# Altium PCB 夏友.PcbDoc (part 3 of 6)
Units mm, origin at the board's own origin, x right, y up, seen from the top; angles counter-clockwise.
Board outline 130.55 x 65.02 mm, 2 copper layers (Top Layer, Bottom Layer); 162 components, 175 nets, 628 pads, 694 vias.
Unrouted connection lines stored in the file: 1.
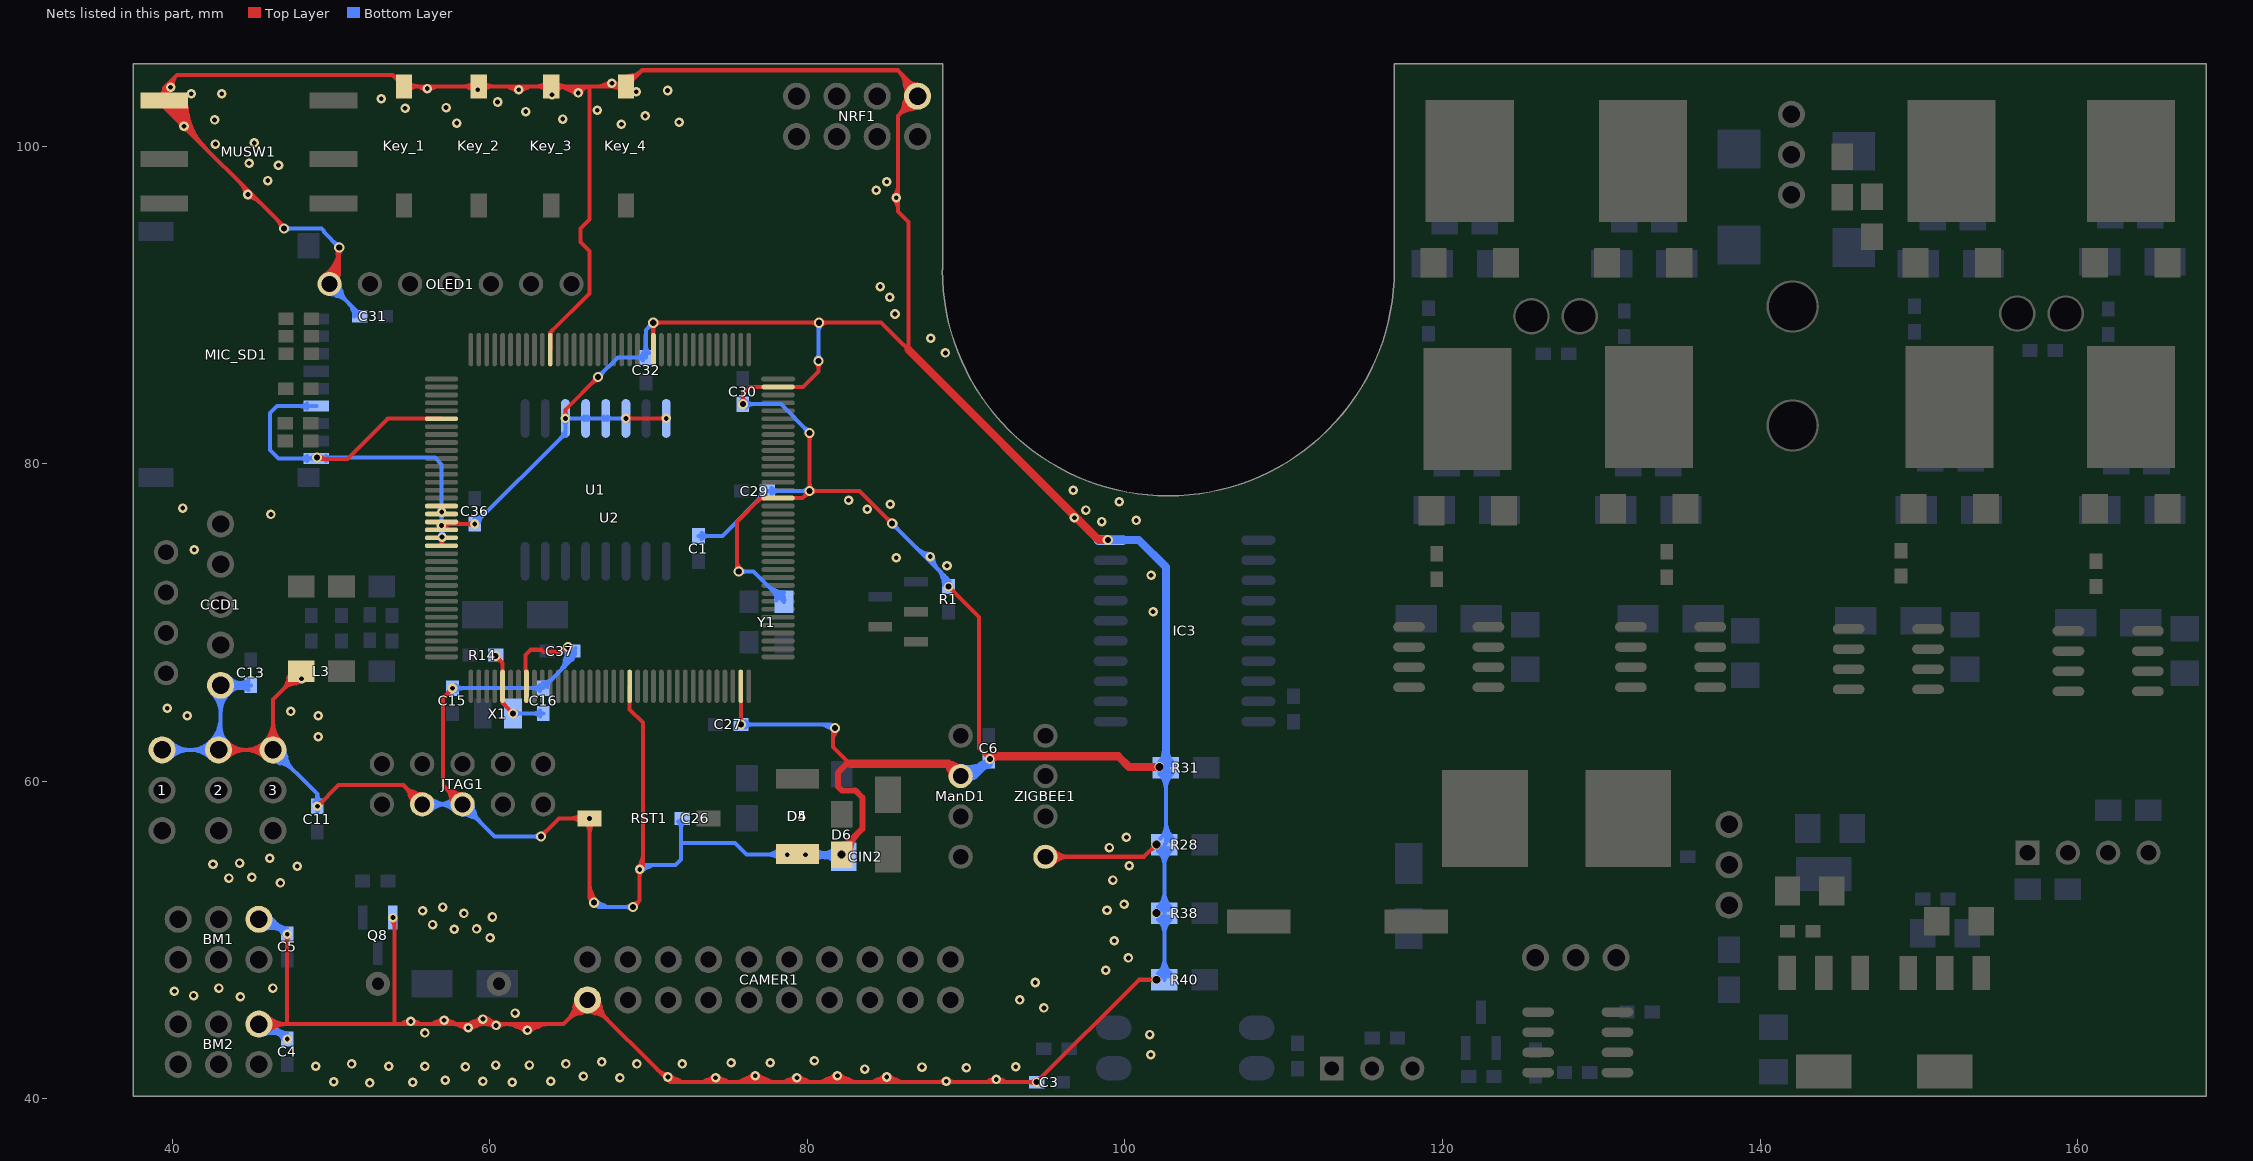
[diagram p3: the nets of this part, all layers, seen from the top]

## Via types
v1: diameter 0.6, hole 0.3, Top Layer to Bottom Layer, 442 vias
v2: diameter 0.635, hole 0.381, Top Layer to Bottom Layer, 150 vias
v3: diameter 0.6, hole 0.381, Top Layer to Bottom Layer, 48 vias
v4: diameter 0.7, hole 0.6, Top Layer to Bottom Layer, 16 vias
v5: diameter 0.6, hole 0.5, Top Layer to Bottom Layer, 10 vias
v6: diameter 0.6, hole 0.4, Top Layer to Bottom Layer, 7 vias
v7: diameter 0.7, hole 0.5, Top Layer to Bottom Layer, 5 vias
v8: diameter 0.6, hole 0.33, Top Layer to Bottom Layer, 5 vias
v9: diameter 0.7, hole 0.4, Top Layer to Bottom Layer, 3 vias
v10: diameter 1, hole 1, Top Layer to Bottom Layer, 2 vias
v11: diameter 3, hole 3, Top Layer to Bottom Layer, 2 vias
v12: diameter 1.016, hole 0.762, Top Layer to Bottom Layer, 2 vias
v13: diameter 0.7, hole 0.381, Top Layer to Bottom Layer, 1 vias
v14: diameter 0.635, hole 0.508, Top Layer to Bottom Layer, 1 vias

## Nets (pads, with @x,y where several pads share a name; then routed paths per layer and width w, separated by ;. In a path a pad name is that pad's centre, name@x,y a point inside that pad or via, vN(x,y) a via of type N, cw(c..) or ccw(c..) an arc to the next point about the centre after c; other vN are vias at no path point) (continued)
DGND: (continued)
  Bottom Layer w0.254: 1.1@39.37,61.976 2.1@42.926,61.976 43.053,62.103 CCD1.5@43.053,66.04 C13.1@44.958,66.04 ; BM2.1@45.466,44.704 46.304,44.704 v1(47.244,43.764) ; BM1.1@45.466,51.308 46.304,51.308 v1(47.244,50.368) ; 3.1@46.068,61.917 ccw(c47.074,62.123) 46.808,61.132 ; 3.1@46.317,61.968 ccw(c47.524,62.215) 47.205,61.025 ; 3.1@46.355,61.976 49.149,59.182 v1(49.149,58.42) C11.1@49.149,58.097 ; 3.1@46.363,62.014 cw(c46.116,60.807) 47.306,61.126 ; 3.1@46.414,62.263 cw(c46.208,61.257) 47.199,61.523 ; 46.818,44.234 cw(c46.666,43.668) C4.2@47.226,43.841 ; 46.818,50.838 cw(c46.666,50.272) C5.2@47.226,50.445 ; 46.836,44.137 ccw(c47.187,44.34) C4.2@47.227,43.936 ; 46.836,50.741 ccw(c47.187,50.944) C5.2@47.227,50.54 ; C4.2@46.856,43.992 ccw(c47.118,44.144) C4.2@47.237,43.864 ; C5.2@46.856,50.596 ccw(c47.118,50.748) C5.2@47.237,50.468 ; v2(47.052,94.805) 47.057,94.8 49.405,94.8 49.568,94.637 49.568,94.582 v2(50.525,93.625) ; C4.2@47.071,44.087 cw(c46.849,43.947) C4.2@47.087,43.837 ; C5.2@47.071,50.691 cw(c46.849,50.551) C5.2@47.087,50.441 ; C4.2@47.076,44.079 ccw(c47.356,44.255) C4.2@47.282,43.933 ; C5.2@47.076,50.683 ccw(c47.356,50.859) C5.2@47.282,50.537 ; MIC_SD1.9@49.089,80.321 46.704,80.321 46.175,80.85 46.175,83.175 46.621,83.621 MIC_SD1.6@49.089,83.621 ; v2(49.127,80.379) 56.546,80.379 56.975,79.95 v1(56.975,76.95) 56.964,76.939 v1(56.964,76.1) 57,76.064 v1(57,75.375) ; OLED1.1@49.787,91.288 ccw(c50.773,91.49) 50.513,90.517 ; OLED1.1@49.911,91.313 51.825,89.399 C31.2@51.825,89.275 ; OLED1.1@49.936,91.437 cw(c49.734,90.451) 50.707,90.711 ; 51.334,89.78 ccw(c52.054,89.973) C31.2@51.75,89.292 ; JTAG1.3@55.753,58.547 JTAG1.5@58.293,58.547 60.315,56.525 v2(63.225,56.525) ; v1@56.879,75.499 ccw(c56.683,75.698) 56.953,75.77 ; v1(57.658,65.862) C16.2@63.373,65.862 65.227,67.716 ; JTAG1.5@58.169,58.522 ccw(c59.155,58.724) 58.895,57.751 ; JTAG1.5@58.318,58.671 cw(c58.116,57.685) 59.089,57.945 ; C36.1@59.017,76.369 ccw(c58.943,76.691) C36.1@59.223,76.515 ; v1(59.055,76.2) 64.77,81.915 v1(64.77,82.85) U1.4@66.04,82.85 U1.5@67.31,82.85 v1(68.58,82.85) ; C36.1@59.073,76.277 cw(c59.633,76.104) 59.481,76.67 ; C36.1@59.212,76.273 cw(c59.45,76.383) C36.1@59.228,76.523 ; C16.2@63.391,65.939 cw(c63.951,65.766) 63.799,66.332 ; 64.713,67.608 cw(c65.627,67.363) C37.2@65.154,68.183 ; C37.2@64.908,68.063 cw(c64.392,67.764) 64.968,67.61 ; 64.945,67.524 cw(c65.642,67.338) C37.2@65.281,67.963 ; C37.2@65.085,68.346 ccw(c65.291,68.211) C37.2@65.128,68.026 ; C37.2@65.225,68.225 C37.2@65.4,68.4 ; C37.2@65.227,68.199 65.227,67.716 ; v2(66.575,52.35) 66.85,52.075 v2(69.025,52.075) ; v2@66.666,52.183 cw(c66.949,51.664) 67.245,52.176 ; v2(66.825,85.45) 68.065,86.69 C32.2@69.85,86.69 69.85,88.425 v2(70.3,88.875) ; v2@66.827,85.64 ccw(c66.83,86.088) 67.15,85.775 ; v2@66.827,85.64 ccw(c66.832,86.082) 67.141,85.766 ccw(c67.457,85.457) 67.015,85.452 cw(c67.463,85.455) 67.15,85.775 ; v1(69.447,54.45) 69.725,54.728 71.697,54.728 72.047,55.078 72.047,56.1 ; v1@69.519,54.607 ccw(c69.784,55.179) 70.099,54.633 ; 69.984,88.559 ccw(c69.668,88.868) 70.11,88.873 cw(c69.662,88.87) 69.975,88.55 ; 69.984,88.559 cw(c70.293,88.243) 70.298,88.685 ccw(c70.295,88.237) 69.975,88.55 ; C26.1@72.136,57.658 72.047,57.569 72.047,56.1 ; C1.2@73.15,75.45 74.65,75.45 C29.1@77.475,78.275 v2(80.15,78.275) ; v2(75.685,73.215) 76.62,73.215 Y1.1@78.537,71.298 ; v2(75.825,63.575) 81.475,63.575 81.697,63.353 v2(81.754,63.353) ; v2(75.946,83.744) 78.331,83.744 v2(80.15,81.925) ; 77.005,77.849 cw(c77.571,77.697) C29.1@77.398,78.257 ; 77.941,72.03 cw(c77.709,71.167) Y1.1@78.571,71.407 ; v1(78.74,55.372) 76.172,55.372 75.447,56.097 72.05,56.097 72.047,56.1 ; 79.834,82.241 cw(c79.518,81.932) v2@79.96,81.927 ; 79.834,82.241 ccw(c80.143,82.557) v2@80.148,82.115 ; v2@79.96,81.927 ccw(c79.512,81.93) 79.825,82.25 ; v2@80.148,82.115 cw(c80.145,82.563) 79.825,82.25 ; v2(80.7,86.475) 80.7,88.825 v2(80.75,88.875) ; 81.165,63.48 ccw(c81.383,63.858) v2@81.641,63.507 ; CIN2.2@82.136,55.41 v7(82.169,55.377) ; v2(85.35,76.225) R1.1@88.9,72.675 ; 85.666,75.909 ccw(c85.357,75.593) 85.352,76.035 cw(c85.355,75.587) 85.675,75.9 ; 85.666,75.909 cw(c85.982,76.218) 85.54,76.223 ccw(c85.988,76.22) 85.675,75.9 ; 88.471,72.929 ccw(c89.366,73.168) 88.909,72.362 cw(c89.173,72.894) R1.1@88.599,72.741 ; 88.526,73.013 ccw(c89.481,73.269) R1.1@88.986,72.413 ; R1.1@88.566,72.699 cw(c88.186,72.312) R1.1@88.727,72.275 ; R1.1@88.639,72.427 ccw(c88.22,72.558) 88.531,72.869 cw(c88.039,72.377) R1.1@88.728,72.286 ; R1.1@88.652,72.723 ccw(c89.367,72.693) R1.1@88.84,72.208 ; R1.1@88.67,72.573 cw(c88.515,72.397) R1.1@88.737,72.32 ; R1.1@88.696,72.527 ccw(c88.478,72.721) 88.76,72.797 ccw(c89.007,72.863) R1.1@88.955,72.613 ; R1.1@88.697,72.703 ccw(c88.9,72.906) R1.1@88.9,72.618 ; v3(88.9,72.263) R1.1@88.9,72.675 ; R31.1@102.13,60.733 cw(c101.953,60.071) R31.1@102.546,60.414 ; R40.1@102.154,47.49 cw(c102.722,47.462) R40.1@102.438,47.955 ; R38.1@102.154,51.681 cw(c102.722,51.653) R38.1@102.438,52.146 ; R38.1@102.154,51.697 ccw(c102.722,51.725) R38.1@102.438,51.232 ; R28.1@102.154,56.015 ccw(c102.722,56.043) R28.1@102.438,55.55 ; R31.1@102.34,60.847 ccw(c102.586,60.768) R31.1@102.457,60.544 ; 102.441,60.105 cw(c103.297,60.599) R31.1@102.342,60.855 ; R40.1@102.494,47.498 R38.1@102.494,51.689 R28.1@102.494,56.007 102.585,56.098 R31.1@102.585,60.85 ; 40.502,61.976 cw(c40.502,63.108) 39.702,62.308 ccw(c40.502,63.108) 40.502,61.976 ; 40.502,61.976 ccw(c40.502,60.844) 39.702,61.644 cw(c40.502,60.844) 40.502,61.976 ; 41.115,61.976 cw(c41.115,63.721) 39.881,62.487 ccw(c41.115,63.721) 41.115,61.976 ; 41.115,61.976 ccw(c41.115,60.231) 39.881,61.465 cw(c41.115,60.231) 41.115,61.976 ; 41.181,61.976 cw(c41.181,60.231) 42.415,61.465 ccw(c41.181,60.231) 41.181,61.976 ; 41.181,61.976 ccw(c41.181,63.721) 2.1@42.415,62.487 ; 41.181,61.976 ccw(c41.181,63.721) 2.1@42.415,62.487 ; 41.794,61.976 cw(c41.794,60.844) 42.594,61.644 ccw(c41.794,60.844) 41.794,61.976 ; 41.794,61.976 ccw(c41.794,63.108) 2.1@42.594,62.308 ; 41.794,61.976 ccw(c41.794,63.108) 2.1@42.594,62.308 ; 2.1@42.415,62.487 ccw(c40.874,64.028) 43.053,64.028 cw(c40.874,64.028) 2.1@42.415,62.487 ; 2.1@42.594,62.308 ccw(c41.487,63.415) 43.053,63.415 ; 2.1@42.594,62.308 ccw(c41.487,63.415) 43.053,63.415 ; 43.053,63.415 ccw(c44.365,63.415) 43.437,62.487 cw(c44.365,63.415) 43.053,63.415 ; 43.053,64.295 cw(c44.798,64.295) CCD1.5@43.564,65.529 ; 43.053,64.295 ccw(c41.308,64.295) 42.542,65.529 cw(c41.308,64.295) 43.053,64.295 ; 43.053,64.295 cw(c44.798,64.295) CCD1.5@43.564,65.529 ; 43.053,64.908 cw(c44.185,64.908) CCD1.5@43.385,65.708 ; 43.053,64.908 ccw(c41.921,64.908) 42.721,65.708 cw(c41.921,64.908) 43.053,64.908 ; 43.053,64.908 cw(c44.185,64.908) CCD1.5@43.385,65.708 ; CCD1.5@43.385,65.708 cw(c44.185,64.908) 44.185,66.04 ; CCD1.5@43.385,65.708 cw(c44.185,64.908) 44.185,66.04 ; CCD1.5@43.564,65.529 cw(c44.798,64.295) C13.1@44.798,66.04 ; CCD1.5@43.564,65.529 cw(c44.798,64.295) C13.1@44.798,66.04 ; 44.128,65.86 cw(c44.333,65.096) C13.1@44.798,65.737 ; 44.128,65.86 cw(c44.333,65.096) C13.1@44.798,65.737 ; 44.128,65.86 cw(c44.333,65.096) C13.1@44.798,65.737 ; 44.128,66.22 ccw(c44.333,66.984) C13.1@44.798,66.343 ; 44.128,66.22 ccw(c44.333,66.984) C13.1@44.798,66.343 ; 44.128,66.22 ccw(c44.333,66.984) C13.1@44.798,66.343 ; 44.185,66.04 cw(c44.185,67.172) 43.385,66.372 ccw(c44.185,67.172) 44.185,66.04 ; 44.299,66.04 cw(c44.299,65.381) 44.765,65.847 ccw(c44.299,65.381) 44.299,66.04 ; 44.299,66.04 ccw(c44.299,66.699) 44.765,66.233 cw(c44.299,66.699) 44.299,66.04 ; C13.1@44.798,66.04 cw(c44.798,67.785) 43.564,66.551 ccw(c44.798,67.785) C13.1@44.798,66.04 ; 46.634,44.227 cw(c46.263,43.584) C4.2@46.98,43.776 ; 46.634,44.227 cw(c46.263,43.584) C4.2@46.98,43.776 ; 46.634,44.227 cw(c46.263,43.584) C4.2@46.98,43.776 ; 46.634,50.831 cw(c46.263,50.188) C5.2@46.98,50.38 ; 46.634,50.831 cw(c46.263,50.188) C5.2@46.98,50.38 ; 46.634,50.831 cw(c46.263,50.188) C5.2@46.98,50.38 ; 46.68,44.09 ccw(c46.9,44.471) C4.2@47.112,44.086 ; 46.68,44.09 ccw(c46.9,44.471) C4.2@47.112,44.086 ; 46.68,44.09 ccw(c46.9,44.471) C4.2@47.112,44.086 ; 46.68,50.694 ccw(c46.9,51.075) C5.2@47.112,50.69 ; 46.68,50.694 ccw(c46.9,51.075) C5.2@47.112,50.69 ; 46.68,50.694 ccw(c46.9,51.075) C5.2@47.112,50.69 ; 46.724,44.22 ccw(c47.215,44.504) C4.2@47.237,43.937 ; 46.724,44.22 ccw(c47.215,44.504) C4.2@47.237,43.937 ; 46.724,44.22 ccw(c47.215,44.504) C4.2@47.237,43.937 ; 46.724,44.22 ccw(c47.215,44.504) C4.2@47.237,43.937 ; 46.724,50.824 ccw(c47.215,51.108) C5.2@47.237,50.541 ; 46.724,50.824 ccw(c47.215,51.108) C5.2@47.237,50.541 ; 46.724,50.824 ccw(c47.215,51.108) C5.2@47.237,50.541 ; 46.724,50.824 ccw(c47.215,51.108) C5.2@47.237,50.541 ; 46.73,44.172 cw(c46.357,43.526) C4.2@47.077,43.719 ; 46.73,44.172 cw(c46.357,43.526) C4.2@47.077,43.719 ; 46.73,44.172 cw(c46.357,43.526) C4.2@47.077,43.719 ; 46.73,50.776 cw(c46.357,50.13) C5.2@47.077,50.323 ; 46.73,50.776 cw(c46.357,50.13) C5.2@47.077,50.323 ; 46.73,50.776 cw(c46.357,50.13) C5.2@47.077,50.323 ; 46.737,44.168 ccw(c47.024,44.666) C4.2@47.173,44.11 ; 46.737,44.168 ccw(c47.024,44.666) C4.2@47.173,44.11 ; 46.737,44.168 ccw(c47.024,44.666) C4.2@47.173,44.11 ; 46.737,50.772 ccw(c47.024,51.27) C5.2@47.173,50.714 ; 46.737,50.772 ccw(c47.024,51.27) C5.2@47.173,50.714 ; 46.737,50.772 ccw(c47.024,51.27) C5.2@47.173,50.714 ; 46.787,44.028 cw(c46.579,43.669) C4.2@46.98,43.776 ; 46.787,44.028 cw(c46.579,43.669) C4.2@46.98,43.776 ; 46.787,44.028 cw(c46.579,43.669) C4.2@46.98,43.776 ; 46.787,50.632 cw(c46.579,50.273) C5.2@46.98,50.38 ; 46.787,50.632 cw(c46.579,50.273) C5.2@46.98,50.38 ; 46.787,50.632 cw(c46.579,50.273) C5.2@46.98,50.38 ; 46.809,44.073 ccw(c47.088,44.235) C4.2@47.19,43.928 ; 46.809,44.073 ccw(c47.088,44.235) C4.2@47.19,43.928 ; 46.809,44.073 ccw(c47.088,44.235) C4.2@47.19,43.928 ; 46.809,44.073 ccw(c47.088,44.235) C4.2@47.19,43.928 ; 46.809,50.677 ccw(c47.088,50.839) C5.2@47.19,50.532 ; 46.809,50.677 ccw(c47.088,50.839) C5.2@47.19,50.532 ; 46.809,50.677 ccw(c47.088,50.839) C5.2@47.19,50.532 ; 46.809,50.677 ccw(c47.088,50.839) C5.2@47.19,50.532 ; C4.2@46.882,43.973 cw(c46.673,43.611) C4.2@47.077,43.719 ; C4.2@46.882,43.973 ccw(c47.091,44.335) C4.2@47.199,43.931 ; C4.2@46.882,43.973 cw(c46.673,43.611) C4.2@47.077,43.719 ; C4.2@46.882,43.973 ccw(c47.091,44.335) C4.2@47.199,43.931 ; C4.2@46.882,43.973 cw(c46.673,43.611) C4.2@47.077,43.719 ; C4.2@46.882,43.973 ccw(c47.091,44.335) C4.2@47.199,43.931 ; C5.2@46.882,50.577 cw(c46.673,50.215) C5.2@47.077,50.323 ; C5.2@46.882,50.577 ccw(c47.091,50.939) C5.2@47.199,50.535 ; C5.2@46.882,50.577 cw(c46.673,50.215) C5.2@47.077,50.323 ; C5.2@46.882,50.577 ccw(c47.091,50.939) C5.2@47.199,50.535 ; C5.2@46.882,50.577 cw(c46.673,50.215) C5.2@47.077,50.323 ; C5.2@46.882,50.577 ccw(c47.091,50.939) C5.2@47.199,50.535 ; C4.2@46.887,44.061 cw(c46.798,43.428) C4.2@47.309,43.813 ; C4.2@46.887,44.061 cw(c46.798,43.428) C4.2@47.309,43.813 ; C4.2@46.887,44.061 cw(c46.798,43.428) C4.2@47.309,43.813 ; C4.2@46.887,44.061 cw(c46.798,43.428) C4.2@47.309,43.813 ; C5.2@46.887,50.665 cw(c46.798,50.032) C5.2@47.309,50.417 ; C5.2@46.887,50.665 cw(c46.798,50.032) C5.2@47.309,50.417 ; C5.2@46.887,50.665 cw(c46.798,50.032) C5.2@47.309,50.417 ; C5.2@46.887,50.665 cw(c46.798,50.032) C5.2@47.309,50.417 ; C4.2@46.929,44.005 ccw(c47.38,44.126) C4.2@47.216,43.688 ; C4.2@46.929,44.005 ccw(c47.38,44.126) C4.2@47.216,43.688 ; C4.2@46.929,44.005 ccw(c47.38,44.126) C4.2@47.216,43.688 ; C5.2@46.929,50.609 ccw(c47.38,50.73) C5.2@47.216,50.292 ; C5.2@46.929,50.609 ccw(c47.38,50.73) C5.2@47.216,50.292 ; C5.2@46.929,50.609 ccw(c47.38,50.73) C5.2@47.216,50.292 ; C4.2@46.934,43.856 ccw(c47.234,44.029) C4.2@47.247,43.683 ; C4.2@46.934,43.856 ccw(c47.234,44.029) C4.2@47.247,43.683 ; C4.2@46.934,43.856 ccw(c47.234,44.029) C4.2@47.247,43.683 ; C4.2@46.934,43.856 ccw(c47.234,44.029) C4.2@47.247,43.683 ; C5.2@46.934,50.46 ccw(c47.234,50.633) C5.2@47.247,50.287 ; C5.2@46.934,50.46 ccw(c47.234,50.633) C5.2@47.247,50.287 ; C5.2@46.934,50.46 ccw(c47.234,50.633) C5.2@47.247,50.287 ; C5.2@46.934,50.46 ccw(c47.234,50.633) C5.2@47.247,50.287 ; C4.2@46.949,44.06 cw(c46.653,43.764) 47.071,43.764 ccw(c46.653,43.764) C4.2@46.949,44.06 ; C4.2@46.949,44.06 ccw(c47.244,44.355) 47.244,43.937 cw(c47.244,44.355) C4.2@46.949,44.06 ; C5.2@46.949,50.664 cw(c46.653,50.368) 47.071,50.368 ccw(c46.653,50.368) C5.2@46.949,50.664 ; C5.2@46.949,50.664 ccw(c47.244,50.959) 47.244,50.541 cw(c47.244,50.959) C5.2@46.949,50.664 ; 47.156,61.175 cw(c47.956,61.976) 46.824,61.976 ccw(c47.956,61.976) 47.156,61.175 ; 47.156,61.175 ccw(c46.355,60.375) 46.355,61.507 cw(c46.355,60.375) 47.156,61.175 ; v1(47.244,43.764) ccw(c46.298,42.818) 45.758,44.042 cw(c46.298,42.818) v1(47.244,43.764) ; v1(47.244,50.368) ccw(c46.298,49.422) 45.758,50.646 cw(c46.298,49.422) v1(47.244,50.368) ; 47.589,60.742 cw(c48.823,61.976) 47.078,61.976 ccw(c48.823,61.976) 47.589,60.742 ; 47.589,60.742 ccw(c46.355,59.508) 46.355,61.253 cw(c46.355,59.508) 47.589,60.742 ; 48.101,80.321 cw(c48.101,79.783) 48.481,80.163 ccw(c48.101,79.783) 48.101,80.321 ; 48.101,80.321 ccw(c48.101,80.859) 48.481,80.479 cw(c48.101,80.859) 48.101,80.321 ; 48.101,83.621 cw(c48.101,83.083) 48.481,83.463 ccw(c48.101,83.083) 48.101,83.621 ; 48.101,83.621 ccw(c48.101,84.159) 48.481,83.779 cw(c48.101,84.159) 48.101,83.621 ; C11.1@49.149,58.097 cw(c49.363,58.097) 49.245,58.276 ccw(c49.363,58.097) C11.1@49.149,58.097 ; C11.1@49.149,58.097 ccw(c48.935,58.097) 49.053,58.276 cw(c48.935,58.097) C11.1@49.149,58.097 ; C11.1@49.149,58.838 cw(c48.731,58.838) 49.027,58.542 ccw(c48.731,58.838) C11.1@49.149,58.838 ; C11.1@49.149,58.838 ccw(c49.567,58.838) 49.271,58.542 cw(c49.567,58.838) C11.1@49.149,58.838 ; 49.149,59.162 cw(c48.49,59.162) 48.956,58.696 ccw(c48.49,59.162) 49.149,59.162 ; 49.149,59.162 ccw(c49.808,59.162) 49.342,58.696 cw(c49.808,59.162) 49.149,59.162 ; MIC_SD1.9@49.587,80.379 cw(c49.587,80.839) 49.262,80.514 ccw(c49.587,80.839) MIC_SD1.9@49.587,80.379 ; MIC_SD1.9@49.587,80.379 ccw(c49.587,79.919) 49.262,80.244 cw(c49.587,79.919) MIC_SD1.9@49.587,80.379 ; 50.2,93.95 ccw(c50.52,94.263) 50.523,93.815 cw(c50.518,94.257) 50.209,93.941 cw(c49.893,93.632) 50.335,93.627 ccw(c49.887,93.63) 50.2,93.95 ; 50.2,93.95 cw(c49.875,93.625) 50.334,93.625 ccw(c49.875,93.625) 50.2,93.95 ; 50.2,93.95 ccw(c50.525,94.275) 50.525,93.815 cw(c50.525,94.275) 50.2,93.95 ; 50.561,90.663 cw(c51.212,91.313) 50.292,91.313 ccw(c51.212,91.313) 50.561,90.663 ; 50.561,90.663 ccw(c49.911,90.012) 49.911,90.932 cw(c49.911,90.012) 50.561,90.663 ; 50.995,90.229 cw(c52.079,91.313) 50.546,91.313 ccw(c52.079,91.313) 50.995,90.229 ; 50.995,90.229 ccw(c49.911,89.145) 49.911,90.678 cw(c49.911,89.145) 50.995,90.229 ; 56.673,58.547 cw(c56.673,59.467) 56.022,58.816 ccw(c56.673,59.467) 56.673,58.547 ; 56.673,58.547 ccw(c56.673,57.627) 56.022,58.278 cw(c56.673,57.627) 56.673,58.547 ; 56.76,58.547 cw(c56.76,57.014) 57.844,58.098 ccw(c56.76,57.014) 56.76,58.547 ; 56.76,58.547 ccw(c56.76,60.08) 57.844,58.996 cw(c56.76,60.08) 56.76,58.547 ; 56.964,76.518 cw(c56.546,76.518) 56.842,76.222 ccw(c56.546,76.518) 56.964,76.518 ; 56.964,76.518 ccw(c57.382,76.518) 57.086,76.222 cw(c57.382,76.518) 56.964,76.518 ; 56.975,77.368 cw(c56.557,77.368) 56.853,77.072 ccw(c56.557,77.368) 56.975,77.368 ; 56.975,77.368 ccw(c57.393,77.368) 57.097,77.072 cw(c57.393,77.368) 56.975,77.368 ; 57,75.793 cw(c56.582,75.793) 56.878,75.497 ccw(c56.582,75.793) 57,75.793 ; 57,75.793 ccw(c57.418,75.793) 57.122,75.497 cw(c57.418,75.793) 57,75.793 ; 57.286,58.547 cw(c57.286,60.08) 56.202,58.996 ccw(c57.286,60.08) 57.286,58.547 ; 57.286,58.547 ccw(c57.286,57.014) 56.202,58.098 cw(c57.286,57.014) 57.286,58.547 ; 57.373,58.547 cw(c57.373,57.627) 58.024,58.278 ccw(c57.373,57.627) 57.373,58.547 ; 57.373,58.547 ccw(c57.373,59.467) 58.024,58.816 cw(c57.373,59.467) 57.373,58.547 ; 58.076,65.862 cw(c58.076,66.28) 57.78,65.985 ccw(c58.076,66.28) 58.076,65.862 ; 58.076,65.862 ccw(c58.076,65.445) 57.78,65.74 cw(c58.076,65.445) 58.076,65.862 ; 58.317,65.862 cw(c58.317,66.521) 57.851,66.055 ccw(c58.317,66.521) 58.317,65.862 ; 58.317,65.862 ccw(c58.317,65.203) 57.851,65.669 cw(c58.317,65.203) 58.317,65.862 ; 58.943,57.897 cw(c59.594,58.547) 58.674,58.547 ccw(c59.594,58.547) 58.943,57.897 ; 58.943,57.897 ccw(c58.293,57.246) 58.293,58.166 cw(c58.293,57.246) 58.943,57.897 ; C36.1@59.083,76.124 ccw(c58.919,76.561) C36.1@59.37,76.441 ; C36.1@59.083,76.124 ccw(c58.919,76.561) C36.1@59.37,76.441 ; C36.1@59.083,76.124 ccw(c58.919,76.561) C36.1@59.37,76.441 ; C36.1@59.35,76.495 cw(c59.055,76.791) 59.055,76.373 ccw(c59.055,76.791) C36.1@59.35,76.495 ; C36.1@59.35,76.495 ccw(c59.646,76.2) 59.228,76.2 cw(c59.646,76.2) C36.1@59.35,76.495 ; 59.377,57.463 cw(c60.461,58.547) 58.928,58.547 ccw(c60.461,58.547) 59.377,57.463 ; 59.377,57.463 ccw(c58.293,56.379) 58.293,57.912 cw(c58.293,56.379) 59.377,57.463 ; 62.714,65.862 cw(c62.714,65.203) 63.18,65.669 ccw(c62.714,65.203) 62.714,65.862 ; 62.714,65.862 ccw(c62.714,66.521) 63.18,66.055 cw(c62.714,66.521) 62.714,65.862 ; 62.765,56.525 cw(c62.765,56.065) 63.09,56.39 ccw(c62.765,56.065) 62.765,56.525 ; 62.765,56.525 ccw(c62.765,56.985) 63.09,56.66 cw(c62.765,56.985) 62.765,56.525 ; C37.2@64.766,68.346 cw(c64.383,68.095) C37.2@64.83,68.002 ; C37.2@64.766,68.346 cw(c64.383,68.095) C37.2@64.83,68.002 ; C37.2@64.766,68.346 cw(c64.383,68.095) C37.2@64.83,68.002 ; U1.3@64.77,82.432 cw(c65.188,82.432) U1.3@64.892,82.728 ; U1.3@64.77,82.432 ccw(c64.352,82.432) 64.648,82.728 cw(c64.352,82.432) U1.3@64.77,82.432 ; U1.3@64.77,82.432 cw(c65.188,82.432) U1.3@64.892,82.728 ; C37.2@64.83,67.998 cw(c65.282,67.903) C37.2@65.029,68.291 ; C37.2@64.83,67.998 cw(c65.282,67.903) C37.2@65.029,68.291 ; C37.2@64.83,67.998 cw(c65.282,67.903) C37.2@65.029,68.291 ; C37.2@64.867,68.269 cw(c64.78,68) C37.2@65.053,67.927 ; C37.2@64.867,68.269 cw(c64.78,68) C37.2@65.053,67.927 ; C37.2@64.867,68.269 cw(c64.78,68) C37.2@65.053,67.927 ; U1.3@64.892,82.728 cw(c65.188,82.432) 65.188,82.85 ; U1.3@64.892,82.728 cw(c65.188,82.432) 65.188,82.85 ; C37.2@64.944,68.51 cw(c64.862,68.254) C37.2@65.122,68.185 ; C37.2@64.944,68.51 cw(c64.862,68.254) C37.2@65.122,68.185 ; C37.2@64.944,68.51 cw(c64.862,68.254) C37.2@65.122,68.185 ; 65.127,82.85 cw(c65.127,83.207) 64.875,82.955 ccw(c65.127,83.207) 65.127,82.85 ; 65.127,82.85 ccw(c65.127,82.493) 64.875,82.745 cw(c65.127,82.493) 65.127,82.85 ; 65.188,82.85 cw(c65.188,83.268) 64.892,82.972 ccw(c65.188,83.268) 65.188,82.85 ; 65.227,67.716 cw(c65.517,67.716) 65.368,67.965 ccw(c65.517,67.716) 65.227,67.716 ; 65.227,67.716 ccw(c64.937,67.716) 65.087,67.965 cw(c64.937,67.716) 65.227,67.716 ; 65.683,82.85 cw(c65.683,82.493) 65.935,82.745 ccw(c65.683,82.493) 65.683,82.85 ; 65.683,82.85 ccw(c65.683,83.207) 65.935,82.955 cw(c65.683,83.207) 65.683,82.85 ; 66.397,82.85 cw(c66.397,83.207) 66.145,82.955 ccw(c66.397,83.207) 66.397,82.85 ; 66.397,82.85 ccw(c66.397,82.493) 66.145,82.745 cw(c66.397,82.493) 66.397,82.85 ; 66.953,82.85 cw(c66.953,82.493) 67.205,82.745 ccw(c66.953,82.493) 66.953,82.85 ; 66.953,82.85 ccw(c66.953,83.207) 67.205,82.955 cw(c66.953,83.207) 66.953,82.85 ; 67.15,85.775 cw(c66.825,86.1) 66.825,85.64 ccw(c66.825,86.1) 67.15,85.775 ; 67.15,85.775 ccw(c67.475,85.45) 67.015,85.45 cw(c67.475,85.45) 67.15,85.775 ; 67.667,82.85 cw(c67.667,83.207) 67.415,82.955 ccw(c67.667,83.207) 67.667,82.85 ; 67.667,82.85 ccw(c67.667,82.493) 67.415,82.745 cw(c67.667,82.493) 67.667,82.85 ; 68.162,82.85 cw(c68.162,82.432) 68.458,82.728 ccw(c68.162,82.432) 68.162,82.85 ; 68.162,82.85 ccw(c68.162,83.268) 68.458,82.972 cw(c68.162,83.268) 68.162,82.85 ; 68.223,82.85 cw(c68.223,82.493) 68.475,82.745 ccw(c68.223,82.493) 68.223,82.85 ; 68.223,82.85 ccw(c68.223,83.207) 68.475,82.955 cw(c68.223,83.207) 68.223,82.85 ; 68.565,52.075 cw(c68.565,51.615) 68.89,51.94 ccw(c68.565,51.615) 68.565,52.075 ; 68.565,52.075 ccw(c68.565,52.535) 68.89,52.21 cw(c68.565,52.535) 68.565,52.075 ; 69.191,86.69 cw(c69.191,86.031) 69.657,86.497 ccw(c69.191,86.031) 69.191,86.69 ; 69.191,86.69 ccw(c69.191,87.349) 69.657,86.883 cw(c69.191,87.349) 69.191,86.69 ; 69.85,87.432 cw(c69.191,87.432) 69.657,86.966 ccw(c69.191,87.432) 69.85,87.432 ; 69.85,87.432 ccw(c70.509,87.432) 70.043,86.966 cw(c70.509,87.432) 69.85,87.432 ; 69.975,88.55 cw(c70.3,88.225) 70.3,88.684 ccw(c70.3,88.225) 69.975,88.55 ; 69.975,88.55 ccw(c69.65,88.875) 70.109,88.875 cw(c69.65,88.875) 69.975,88.55 ; 73.809,75.45 cw(c73.809,76.109) 73.343,75.643 ccw(c73.809,76.109) 73.809,75.45 ; 73.809,75.45 ccw(c73.809,74.791) 73.343,75.257 cw(c73.809,74.791) 73.809,75.45 ; 76.145,73.215 cw(c76.145,73.675) 75.82,73.35 ccw(c76.145,73.675) 76.145,73.215 ; 76.145,73.215 ccw(c76.145,72.755) 75.82,73.08 cw(c76.145,72.755) 76.145,73.215 ; C27.1@76.285,63.575 cw(c76.285,64.035) 75.96,63.71 ccw(c76.285,64.035) C27.1@76.285,63.575 ; C27.1@76.285,63.575 ccw(c76.285,63.115) 75.96,63.44 cw(c76.285,63.115) C27.1@76.285,63.575 ; 76.406,83.744 cw(c76.406,84.204) 76.081,83.879 ccw(c76.406,84.204) 76.406,83.744 ; 76.406,83.744 ccw(c76.406,83.284) 76.081,83.609 cw(c76.406,83.284) 76.406,83.744 ; 76.567,63.575 cw(c76.567,64.234) 76.101,63.768 ccw(c76.567,64.234) 76.567,63.575 ; 76.567,63.575 ccw(c76.567,62.916) 76.101,63.382 cw(c76.567,62.916) 76.567,63.575 ; 76.605,83.744 cw(c76.605,84.403) 76.139,83.937 ccw(c76.605,84.403) 76.605,83.744 ; 76.605,83.744 ccw(c76.605,83.085) 76.139,83.551 cw(c76.605,83.085) 76.605,83.744 ; 78.217,78.275 cw(c78.217,78.934) 77.751,78.468 ccw(c78.217,78.934) 78.217,78.275 ; 78.217,78.275 ccw(c78.217,77.616) 77.751,78.082 cw(c78.217,77.616) 78.217,78.275 ; D4.1@78.322,55.372 cw(c78.322,54.954) 78.618,55.25 ccw(c78.322,54.954) D4.1@78.322,55.372 ; D4.1@78.322,55.372 ccw(c78.322,55.79) 78.618,55.494 cw(c78.322,55.79) D4.1@78.322,55.372 ; 79.69,78.275 cw(c79.69,77.815) 80.015,78.14 ccw(c79.69,77.815) 79.69,78.275 ; 79.69,78.275 ccw(c79.69,78.735) 80.015,78.41 cw(c79.69,78.735) 79.69,78.275 ; 79.825,82.25 cw(c79.5,81.925) 79.959,81.925 ccw(c79.5,81.925) 79.825,82.25 ; 79.825,82.25 ccw(c80.15,82.575) 80.15,82.115 cw(c80.15,82.575) 79.825,82.25 ; 80.7,86.935 cw(c80.24,86.935) 80.565,86.61 ccw(c80.24,86.935) 80.7,86.935 ; 80.7,86.935 ccw(c81.16,86.935) 80.835,86.61 cw(c81.16,86.935) 80.7,86.935 ; 85.675,75.9 cw(c86,76.225) 85.54,76.225 ccw(c86,76.225) 85.675,75.9 ; 85.675,75.9 ccw(c85.35,75.575) 85.35,76.035 cw(c85.35,75.575) 85.675,75.9 ; 88.406,73.169 ccw(c89.609,73.491) R1.1@88.986,72.413 ; 88.406,73.169 ccw(c89.609,73.491) R1.1@88.986,72.413 ; 88.406,73.169 ccw(c89.609,73.491) R1.1@88.986,72.413 ; R1.1@88.565,72.577 ccw(c89.175,72.74) R1.1@88.86,72.193 ; R1.1@88.565,72.577 ccw(c89.175,72.74) R1.1@88.86,72.193 ; R1.1@88.565,72.577 ccw(c89.175,72.74) R1.1@88.86,72.193 ; R1.1@88.75,72.35 ccw(c88.38,72.563) R1.1@88.793,72.674 ; R1.1@88.75,72.35 ccw(c88.38,72.563) R1.1@88.793,72.674 ; R1.1@88.75,72.35 ccw(c88.38,72.563) R1.1@88.793,72.674 ; R1.1@88.797,72.66 ccw(c89.19,72.766) R1.1@88.987,72.413 ; R1.1@88.797,72.66 ccw(c89.19,72.766) R1.1@88.987,72.413 ; R1.1@88.797,72.66 ccw(c89.19,72.766) R1.1@88.987,72.413 ; R1.1@88.9,72.675 cw(c88.496,72.675) 88.779,72.387 ccw(c88.496,72.675) R1.1@88.9,72.675 ; R1.1@88.9,72.675 ccw(c89.304,72.675) 89.021,72.387 cw(c89.304,72.675) R1.1@88.9,72.675 ; R40.1@101.936,47.665 ccw(c101.695,48.565) R40.1@102.502,48.099 ; R40.1@101.936,47.665 ccw(c101.695,48.565) R40.1@102.502,48.099 ; R40.1@101.936,47.665 ccw(c101.695,48.565) R40.1@102.502,48.099 ; R38.1@101.936,51.522 cw(c101.695,50.622) R38.1@102.502,51.088 ; R38.1@101.936,51.522 cw(c101.695,50.622) R38.1@102.502,51.088 ; R38.1@101.936,51.522 cw(c101.695,50.622) R38.1@102.502,51.088 ; R38.1@101.936,51.856 ccw(c101.695,52.756) R38.1@102.502,52.29 ; R38.1@101.936,51.856 ccw(c101.695,52.756) R38.1@102.502,52.29 ; R38.1@101.936,51.856 ccw(c101.695,52.756) R38.1@102.502,52.29 ; R28.1@101.936,55.84 cw(c101.695,54.94) R28.1@102.502,55.406 ; R28.1@101.936,55.84 cw(c101.695,54.94) R28.1@102.502,55.406 ; R28.1@101.936,55.84 cw(c101.695,54.94) R28.1@102.502,55.406 ; R31.1@102.13,60.733 cw(c101.99,60.209) R31.1@102.459,60.48 ; R31.1@102.13,60.733 cw(c101.99,60.209) R31.1@102.459,60.48 ; R31.1@102.13,60.733 cw(c101.99,60.209) R31.1@102.459,60.48 ; R31.1@102.342,60.855 ccw(c102.625,60.779) R31.1@102.371,60.633 ; R31.1@102.342,60.855 ccw(c102.625,60.779) R31.1@102.371,60.633 ; R31.1@102.342,60.855 ccw(c102.625,60.779) R31.1@102.371,60.633 ; 102.494,48.232 cw(c101.76,48.232) 102.279,47.713 ccw(c101.76,48.232) 102.494,48.232 ; 102.494,48.232 ccw(c103.228,48.232) 102.709,47.713 cw(c103.228,48.232) 102.494,48.232 ; 102.494,48.845 cw(c101.147,48.845) 102.099,47.893 ccw(c101.147,48.845) 102.494,48.845 ; 102.494,48.845 ccw(c103.841,48.845) 102.889,47.893 cw(c103.841,48.845) 102.494,48.845 ; 102.494,50.342 cw(c103.841,50.342) 102.889,51.294 ccw(c103.841,50.342) 102.494,50.342 ; 102.494,50.342 ccw(c101.147,50.342) 102.099,51.294 cw(c101.147,50.342) 102.494,50.342 ; 102.494,50.955 cw(c103.228,50.955) 102.709,51.474 ccw(c103.228,50.955) 102.494,50.955 ; 102.494,50.955 ccw(c101.76,50.955) 102.279,51.474 cw(c101.76,50.955) 102.494,50.955 ; 102.494,52.423 cw(c101.76,52.423) 102.279,51.904 ccw(c101.76,52.423) 102.494,52.423 ; 102.494,52.423 ccw(c103.228,52.423) 102.709,51.904 cw(c103.228,52.423) 102.494,52.423 ; 102.494,53.036 cw(c101.147,53.036) 102.099,52.084 ccw(c101.147,53.036) 102.494,53.036 ; 102.494,53.036 ccw(c103.841,53.036) 102.889,52.084 cw(c103.841,53.036) 102.494,53.036 ; 102.494,54.66 cw(c103.841,54.66) 102.889,55.612 ccw(c103.841,54.66) 102.494,54.66 ; 102.494,54.66 ccw(c101.147,54.66) 102.099,55.612 cw(c101.147,54.66) 102.494,54.66 ; 102.494,55.273 cw(c103.228,55.273) 102.709,55.792 ccw(c103.228,55.273) 102.494,55.273 ; 102.494,55.273 ccw(c101.76,55.273) 102.279,55.792 cw(c101.76,55.273) 102.494,55.273 ; 102.585,59.503 cw(c103.932,59.503) 102.98,60.455 ccw(c103.932,59.503) 102.585,59.503 ; 102.585,59.503 ccw(c101.238,59.503) 102.19,60.455 cw(c101.238,59.503) 102.585,59.503 ; 102.585,60.116 cw(c103.319,60.116) 102.8,60.635 ccw(c103.319,60.116) 102.585,60.116 ; 102.585,60.116 ccw(c101.851,60.116) 102.37,60.635 cw(c101.851,60.116) 102.585,60.116 ; BM2.1@45.45,44.74 cw(c45.816,43.91) 46.457,44.551 ccw(c45.816,43.91) BM2.1@45.45,44.74 ; BM1.1@45.45,51.344 cw(c45.816,50.514) 46.457,51.155 ccw(c45.816,50.514) BM1.1@45.45,51.344 ; BM2.1@45.553,44.507 cw(c45.977,43.546) 46.719,44.289 ccw(c45.977,43.546) BM2.1@45.553,44.507 ; BM1.1@45.553,51.111 cw(c45.977,50.15) 46.719,50.893 ccw(c45.977,50.15) BM1.1@45.553,51.111 ; BM2.1@45.655,44.275 cw(c46.137,43.182) 46.982,44.027 ccw(c46.137,43.182) BM2.1@45.655,44.275 ; BM1.1@45.655,50.879 cw(c46.137,49.786) 46.982,50.631 ccw(c46.137,49.786) BM1.1@45.655,50.879 ; 46.637,44.371 ccw(c47.244,44.978) 47.244,44.12 cw(c47.244,44.978) 46.637,44.371 ; 46.637,50.975 ccw(c47.244,51.582) 47.244,50.724 cw(c47.244,51.582) 46.637,50.975 ; 46.836,44.172 cw(c46.511,43.847) 46.971,43.847 ccw(c46.511,43.847) 46.836,44.172 ; 46.836,50.776 cw(c46.511,50.451) 46.971,50.451 ccw(c46.511,50.451) 46.836,50.776 ; v2@47.187,94.67 cw(c47.502,94.355) 47.502,94.8 ccw(c47.502,94.355) v2@47.187,94.67 ; v2@47.187,94.939 ccw(c47.522,95.275) 47.522,94.8 cw(c47.522,95.275) v2@47.187,94.939 ; MIC_SD1.9@48.528,80.321 ccw(c48.528,80.979) 48.993,80.514 cw(c48.528,80.979) MIC_SD1.9@48.528,80.321 ; MIC_SD1.9@48.807,80.321 cw(c48.807,80.059) 48.993,80.244 ccw(c48.807,80.059) MIC_SD1.9@48.807,80.321 ; MIC_SD1.9@49.697,80.163 cw(c50.217,79.643) 50.217,80.379 ccw(c50.217,79.643) MIC_SD1.9@49.697,80.163 ; MIC_SD1.9@49.697,80.479 ccw(c49.938,80.72) 49.938,80.379 cw(c49.938,80.72) MIC_SD1.9@49.697,80.479 ; 51.13,90.094 cw(c50.311,89.275) 51.469,89.275 ccw(c50.311,89.275) 51.13,90.094 ; C31.2@51.564,89.66 cw(c51.178,89.275) 51.723,89.275 ccw(c51.178,89.275) C31.2@51.564,89.66 ; v1@56.842,75.978 cw(c56.459,75.595) 57,75.595 ccw(c56.459,75.595) v1@56.842,75.978 ; v1@56.853,76.828 cw(c56.584,76.559) 56.964,76.559 ccw(c56.584,76.559) v1@56.853,76.828 ; 56.964,76.506 cw(c57.419,76.506) 57.097,76.828 ccw(c57.419,76.506) 56.964,76.506 ; 57,75.769 cw(c57.295,75.769) 57.086,75.978 ccw(c57.295,75.769) 57,75.769 ; C36.1@59.055,76.555 ccw(c59.055,77.414) 59.662,76.807 cw(c59.055,77.414) C36.1@59.055,76.555 ; C36.1@59.328,76.282 cw(c59.788,76.282) 59.463,76.608 ccw(c59.788,76.282) C36.1@59.328,76.282 ; C16.2@63.373,66.218 ccw(c63.373,67.076) 63.98,66.469 cw(c63.373,67.076) C16.2@63.373,66.218 ; C16.2@63.646,65.945 cw(c64.106,65.945) 63.781,66.27 ccw(c64.106,65.945) C16.2@63.646,65.945 ; 64.279,66.768 ccw(c62.848,68.199) 64.872,68.199 cw(c62.848,68.199) 64.279,66.768 ; 64.492,81.637 cw(c64.77,81.358) 64.77,81.752 ccw(c64.77,81.358) 64.492,81.637 ; 64.528,81.673 ccw(c64.301,81.9) 64.622,81.9 cw(c64.301,81.9) 64.528,81.673 ; 64.713,67.202 ccw(c63.716,68.199) 65.126,68.199 cw(c63.716,68.199) 64.713,67.202 ; C37.2@64.841,68.279 cw(c64.533,67.657) 65.227,67.657 ccw(c64.533,67.657) C37.2@64.841,68.279 ; C37.2@64.953,68.507 cw(c64.735,68.066) 65.227,68.066 ccw(c64.735,68.066) C37.2@64.953,68.507 ; 65.146,67.635 ccw(c64.583,68.199) 65.38,68.199 cw(c64.583,68.199) 65.146,67.635 ; v2@66.53,52.305 ccw(c67.086,52.861) 67.086,52.075 cw(c67.086,52.861) v2@66.53,52.305 ; v2@66.71,52.485 ccw(c67.699,53.474) 67.699,52.075 cw(c67.699,53.474) v2@66.71,52.485 ; v1@69.39,54.507 cw(c69.923,53.974) 69.923,54.728 ccw(c69.923,53.974) v1@69.39,54.507 ; v1@69.569,54.328 cw(c70.536,53.361) 70.536,54.728 ccw(c70.536,53.361) v1@69.569,54.328 ; C26.1@71.86,57.465 cw(c71.41,57.015) 72.047,57.015 ccw(c71.41,57.015) C26.1@71.86,57.465 ; 72.047,56.983 cw(c72.729,56.983) 72.247,57.465 ccw(c72.729,56.983) 72.047,56.983 ; 76.868,77.668 ccw(c76.261,78.275) 77.12,78.275 cw(c76.261,78.275) 76.868,77.668 ; 77.067,77.867 cw(c77.393,77.542) 77.393,78.002 ccw(c77.393,77.542) 77.067,77.867 ; 77.356,55.372 ccw(c77.356,56.704) 78.298,55.762 cw(c77.356,56.704) 77.356,55.372 ; 77.539,55.372 cw(c77.539,54.299) 78.298,55.058 ccw(c77.539,54.299) 77.539,55.372 ; 77.559,72.276 ccw(c78.537,73.254) 78.537,71.871 cw(c78.537,73.254) 77.559,72.276 ; 77.8,72.035 cw(c77.163,71.398) 78.064,71.398 ccw(c77.163,71.398) 77.8,72.035 ; 77.969,55.372 ccw(c77.969,56.091) 78.477,55.583 cw(c77.969,56.091) 77.969,55.372 ; Y1.1@77.992,71.842 ccw(c78.537,72.387) 78.537,71.617 cw(c78.537,72.387) Y1.1@77.992,71.842 ; v2@80.615,88.74 cw(c80.411,88.536) 80.7,88.536 ccw(c80.411,88.536) v2@80.615,88.74 ; 80.7,88.294 cw(c81.331,88.294) 80.885,88.74 ccw(c81.331,88.294) 80.7,88.294 ; 80.758,63.575 cw(c80.758,62.357) 81.619,63.218 ccw(c80.758,62.357) 80.758,63.575 ; 81.372,63.575 cw(c81.372,62.971) 81.799,63.398 ccw(c81.372,62.971) 81.372,63.575 ; 86.9,74.675 ccw(c87.75,75.525) 87.75,74.323 cw(c87.75,75.525) 86.9,74.675 ; 87.333,74.242 ccw(c87.75,74.658) 87.75,74.069 cw(c87.75,74.658) 87.333,74.242 ; v1@87.669,74.15 ccw(c88.258,74.15) 87.842,73.733 cw(c88.258,74.15) v1@87.669,74.15 ; v1@87.923,74.15 ccw(c89.125,74.15) 88.275,73.3 cw(c89.125,74.15) v1@87.923,74.15 ; 88.201,73.374 cw(c87.172,72.345) 88.627,72.345 ccw(c87.172,72.345) 88.201,73.374 ; 88.313,73.262 cw(c87.315,72.263) 88.727,72.263 ccw(c87.315,72.263) 88.313,73.262 ; 88.635,72.94 cw(c88.04,72.345) 88.881,72.345 ccw(c88.04,72.345) 88.635,72.94 ; 88.747,72.828 cw(c88.182,72.263) 88.981,72.263 ccw(c88.182,72.263) 88.747,72.828 ; R31.1@102.053,60.778 cw(c100.768,59.493) 102.585,59.493 ccw(c100.768,59.493) R31.1@102.053,60.778 ; R31.1@102.232,60.957 cw(c101.381,60.106) 102.585,60.106 ccw(c101.381,60.106) R31.1@102.232,60.957 ; R28.1@102.249,56.402 ccw(c101.439,57.212) 102.585,57.212 cw(c101.439,57.212) R28.1@102.249,56.402 ; R31.1@102.412,61.137 cw(c101.994,60.719) 102.585,60.719 ccw(c101.994,60.719) R31.1@102.412,61.137 ; 102.585,56.883 ccw(c103.52,56.883) 102.859,56.222 cw(c103.52,56.883) 102.585,56.883 ; 102.585,57.497 ccw(c104.134,57.497) 103.039,56.402 cw(c104.134,57.497) 102.585,57.497
  Bottom Layer w0.381: D4.1@79.375,55.41 CIN2.2@82.136,55.41 ; D4.1@80.367,55.067 cw(c81,54.252) 81.267,55.249 ; D4.1@80.476,55.627 ccw(c80.953,55.902) 80.81,55.371 ; 81.149,55.41 cw(c81.149,56.459) 80.407,55.717 ccw(c81.149,56.459) 81.149,55.41 ; 81.149,55.41 ccw(c81.149,54.361) 80.407,55.103 cw(c81.149,54.361) 81.149,55.41 ; D4.1@79.527,55.41 cw(c79.527,55.016) 79.806,55.295 ccw(c79.527,55.016) D4.1@79.527,55.41 ; D4.1@79.96,55.295 cw(c80.239,55.016) 80.239,55.41 ccw(c80.239,55.016) D4.1@79.96,55.295 ; D4.1@80.665,55.41 cw(c80.665,53.717) 81.862,54.914 ccw(c80.665,53.717) D4.1@80.665,55.41 ; 80.978,55.41 ccw(c80.978,56.66) 81.862,55.776 cw(c80.978,56.66) 80.978,55.41 ; CIN2.2@81.704,55.41 cw(c81.704,54.912) 82.056,55.264 ccw(c81.704,54.912) CIN2.2@81.704,55.41
  Bottom Layer w0.508: 90.837,60.838 ccw(c90.869,59.163) ManD1.2@89.662,60.325 ; IC3.10@99.125,75.2 100.875,75.2 102.585,73.49 R31.1@102.585,60.85 ; ManD1.2@89.662,60.325 ccw(c89.948,61.48) 90.789,60.639 cw(c89.948,61.48) ManD1.2@89.662,60.325 ; ManD1.2@89.662,60.325 90.475,60.325 ; 90.475,60.325 cw(c90.475,60.722) 90.119,60.548 ccw(c90.475,60.722) 90.475,60.325 ; 90.475,60.325 ccw(c90.475,59.928) 90.119,60.102 cw(c90.475,59.928) 90.475,60.325 ; 90.475,60.325 C6.2@91.425,61.275 ; 90.935,60.992 cw(c91.233,60.475) C6.2@91.387,61.051 ; 90.935,60.992 cw(c91.233,60.475) C6.2@91.387,61.051 ; 90.935,60.992 cw(c91.233,60.475) C6.2@91.387,61.051 ; C6.2@91.425,61.275 cw(c90.2,62.5) 89.784,60.818 ccw(c90.2,62.5) C6.2@91.425,61.275 ; 102.585,61.891 cw(c101.544,61.891) 102.28,61.155 ccw(c101.544,61.891) 102.585,61.891 ; 102.585,61.891 ccw(c103.626,61.891) 102.89,61.155 cw(c103.626,61.891) 102.585,61.891 ; C6.2@91.035,60.885 cw(c91.425,60.495) 91.425,61.046 ccw(c91.425,60.495) C6.2@91.035,60.885 ; R31.1@102.142,60.933 ccw(c101.074,62.001) 102.585,62.001 cw(c101.074,62.001) R31.1@102.142,60.933
  other v1: 52.45,41 55.15,41.05 61.425,41.05 50.175,41.075 59.575,41.1 63.85,41.1 88.75,41.1 57.2,41.175 91.9,41.225 68.2,41.325 74.225,41.325 79.35,41.325 71.225,41.375 85,41.375 65.9,41.425 76.725,41.45 81.9,41.45 83.625,41.875 90.025,41.95 87.225,42 58.475,42.025 93.125,42.025 49.05,42.05 53.65,42.05 55.925,42.05 60.375,42.125 62.5,42.125 51.3,42.2 64.8,42.2 69.275,42.2 72.125,42.2 75.2,42.275 77.675,42.275 67.05,42.325 80.45,42.4 101.625,42.775 101.575,44.05 55.925,44.15 62.375,44.325 58.65,44.475 60.4,44.625 55.025,44.875 57.125,44.95 59.575,45.025 61.6,45.4 94.9,45.725 93.375,46.225 44.3,46.425 41.35,46.5 40.15,46.775 42.95,46.975 46.35,46.975 94.35,47.325 98.8,48.1 100.225,48.875 99.325,49.95 60.025,50.15 57.775,50.675 59.175,50.7 56.4,50.975 60.175,51.45 58.375,51.675 55.775,51.85 98.875,51.875 57.05,52.075 99.95,52.25 46.825,53.6 99.25,53.775 43.575,53.9 45.025,53.95 47.875,54.65 100.275,54.675 42.575,54.775 44.25,54.85 46.15,55.15 79.883,55.372 99.025,55.825 100.1,56.475 49.2,62.8 40.95,64.125 49.2,64.125 47.475,64.4 39.7,64.6 48.15,66.45 101.775,70.675 101.65,72.975 88.8,73.575 85.6,74.075 87.75,74.15 41.4,74.575 98.55,76.35 100.725,76.425 96.825,76.6 46.225,76.8 97.55,77.075 83.775,77.125 40.675,77.2 85.225,77.45 99.65,77.6 82.6,77.7 96.75,78.325 88.7,86.975 87.775,87.9 85.525,89.425 85.2,90.475 84.6,91.15 85.6,96.75 44.775,96.95 84.35,97.225 85,97.75 46.025,97.825 46.7,98.8 44.85,98.925 42.725,100.125 45.175,100.2 40.75,101.25 68.3,101.375 57.925,101.45 71.925,101.5 42.675,101.65 64.6,101.7 69.8,101.9 62.275,102.175 66.775,102.25 54.675,102.375 57.25,102.425 60.5,102.775 53.175,102.975 63.925,103.225 41.2,103.3 43.125,103.3 65.575,103.35 69.225,103.425 71.2,103.5 59.25,103.55 61.825,103.55 56.075,103.625 39.9,103.7 67.7,103.95
  other v5: 101.981,51.689
EXTAL32: C16.1 R14.2 U2.41 X1.2 | length 14.4
  Top Layer w0.254: v2(60.35,67.9) 60.814,67.436 U2.41@60.814,65.981 60.814,64.936 v2(61.475,64.275) ; v2@60.355,67.71 cw(c60.366,67.287) 60.668,67.582 ; v2@60.54,67.895 ccw(c60.963,67.884) 60.668,67.582 ; v2@60.352,67.71 cw(c60.355,67.262) 60.675,67.575 ; v2@60.352,67.71 cw(c60.357,67.268) 60.666,67.584 ccw(c60.357,67.268) v2@60.352,67.71 ; v2@60.54,67.898 ccw(c60.982,67.893) 60.666,67.584 cw(c60.982,67.893) v2@60.54,67.898 ; v2@60.54,67.898 ccw(c60.988,67.895) 60.675,67.575 ; 60.675,67.575 ccw(c60.35,67.25) 60.35,67.709 cw(c60.35,67.25) 60.675,67.575 ; v2@60.541,67.9 ccw(c61,67.9) 60.675,67.575 cw(c61,67.9) v2@60.541,67.9 ; U2.41@60.837,65.081 ccw(c61.243,65.081) 60.956,64.794 cw(c61.243,65.081) U2.41@60.837,65.081
  Bottom Layer w0.254: X1.2@61.475,64.262 C16.1@63.373,64.262 ; 62.714,64.262 cw(c62.714,63.603) 63.18,64.069 ccw(c62.714,63.603) 62.714,64.262 ; 62.714,64.262 ccw(c62.714,64.921) 63.18,64.455 cw(c62.714,64.921) 62.714,64.262 ; X1.2@61.61,64.14 cw(c61.904,63.846) 61.904,64.262 ccw(c61.904,63.846) X1.2@61.61,64.14 ; X1.2@61.61,64.41 ccw(c61.966,64.766) 61.966,64.262 cw(c61.966,64.766) X1.2@61.61,64.41